# Altium PCB DB_1.PcbDoc
Units mm, origin at the board's own origin, x right, y up, seen from the top; angles counter-clockwise.
Board outline 57.15 x 76.2 mm, 4 copper layers (Top Layer, Signal Layer 1, Ground, Bottom Layer), stack 0.778 mm thick; 72 components, 63 nets, 359 pads, 131 vias.
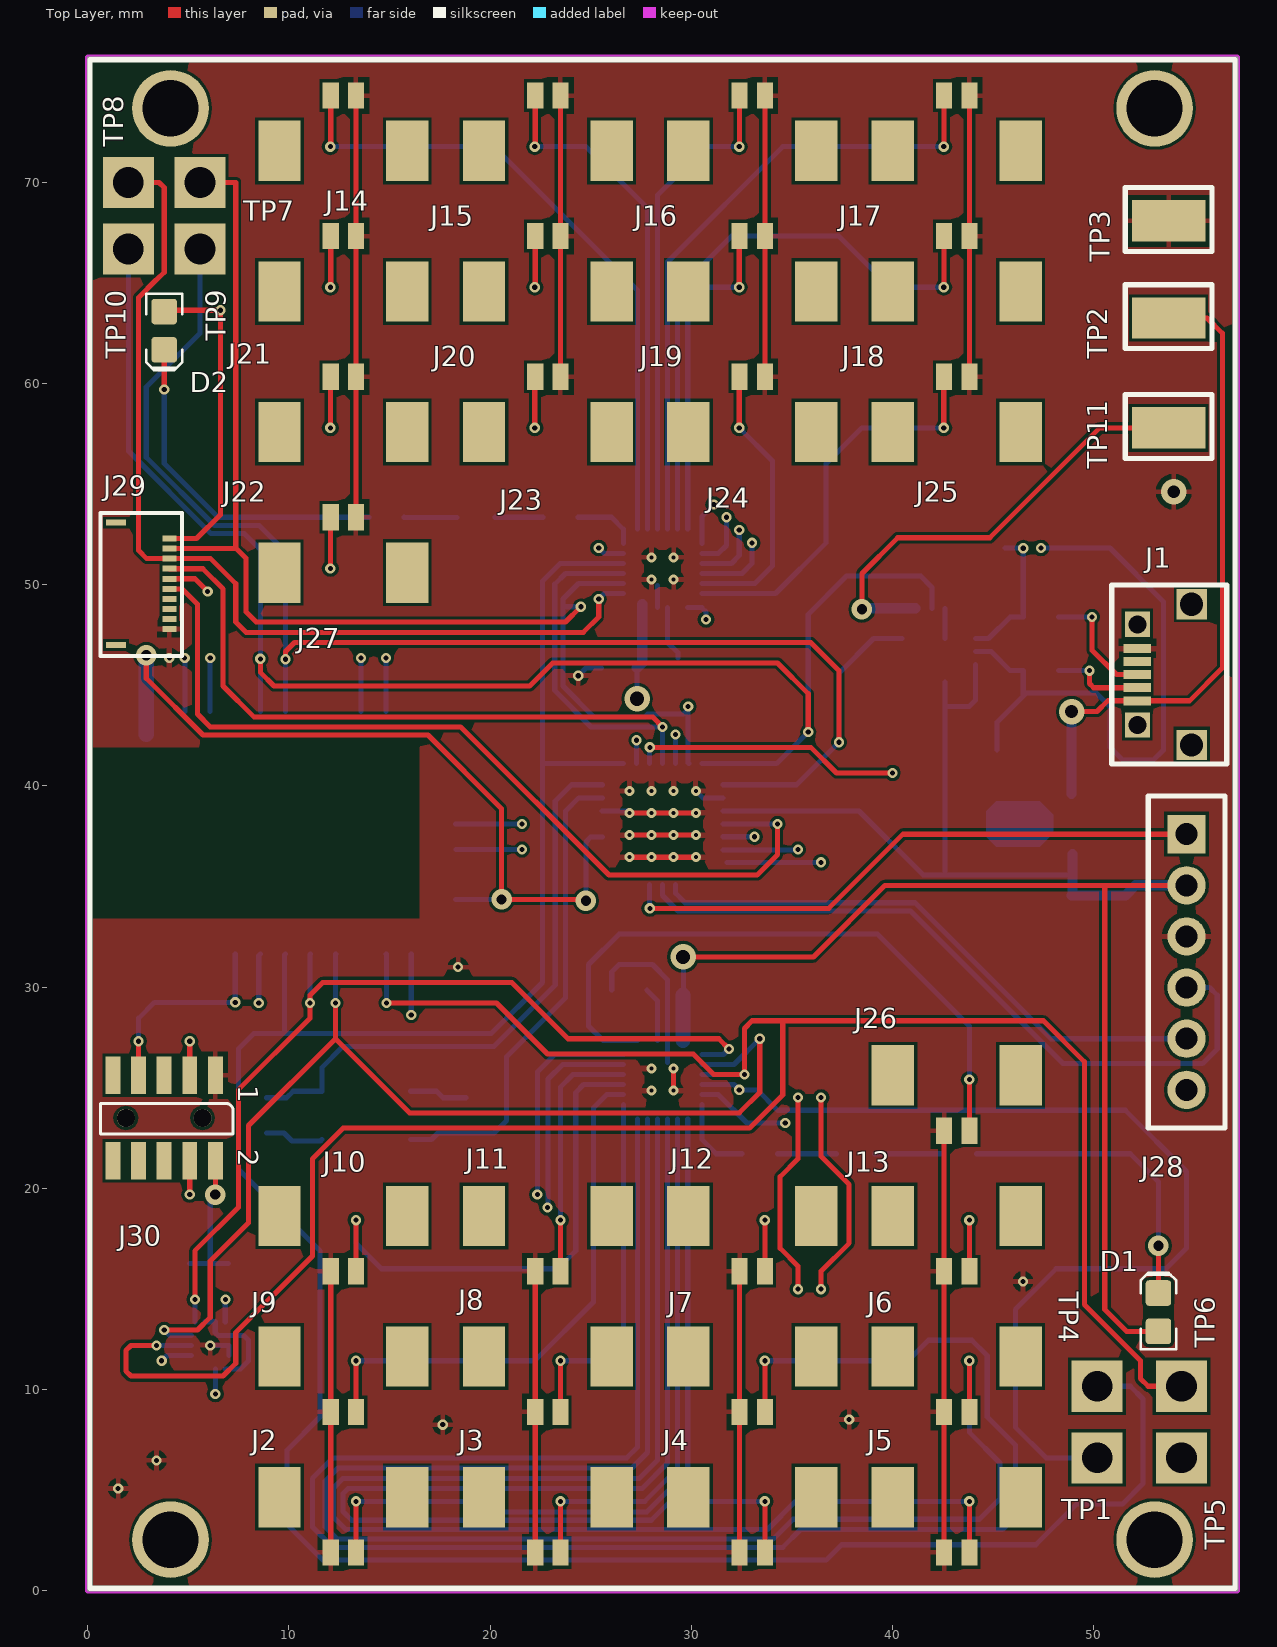
[diagram p0: Top Layer view]
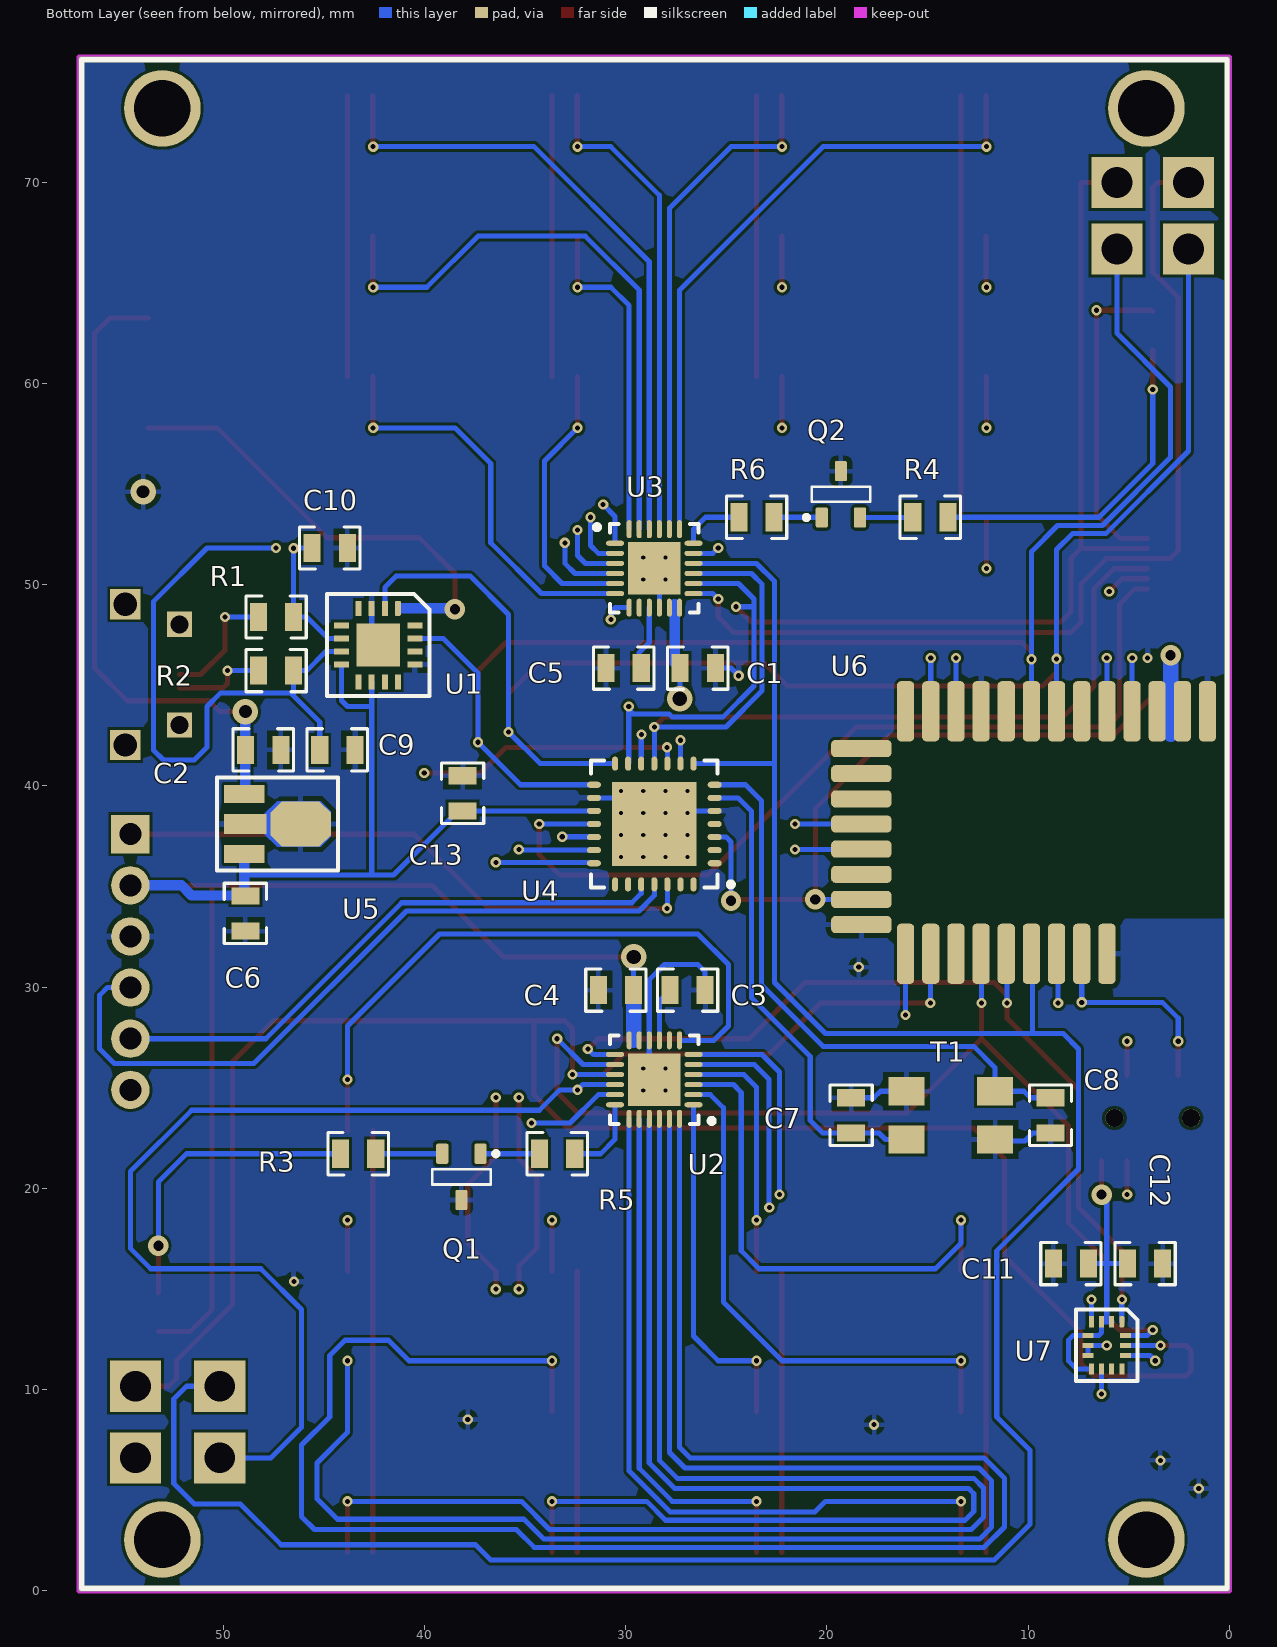
[diagram p1: Bottom Layer view, seen from below]
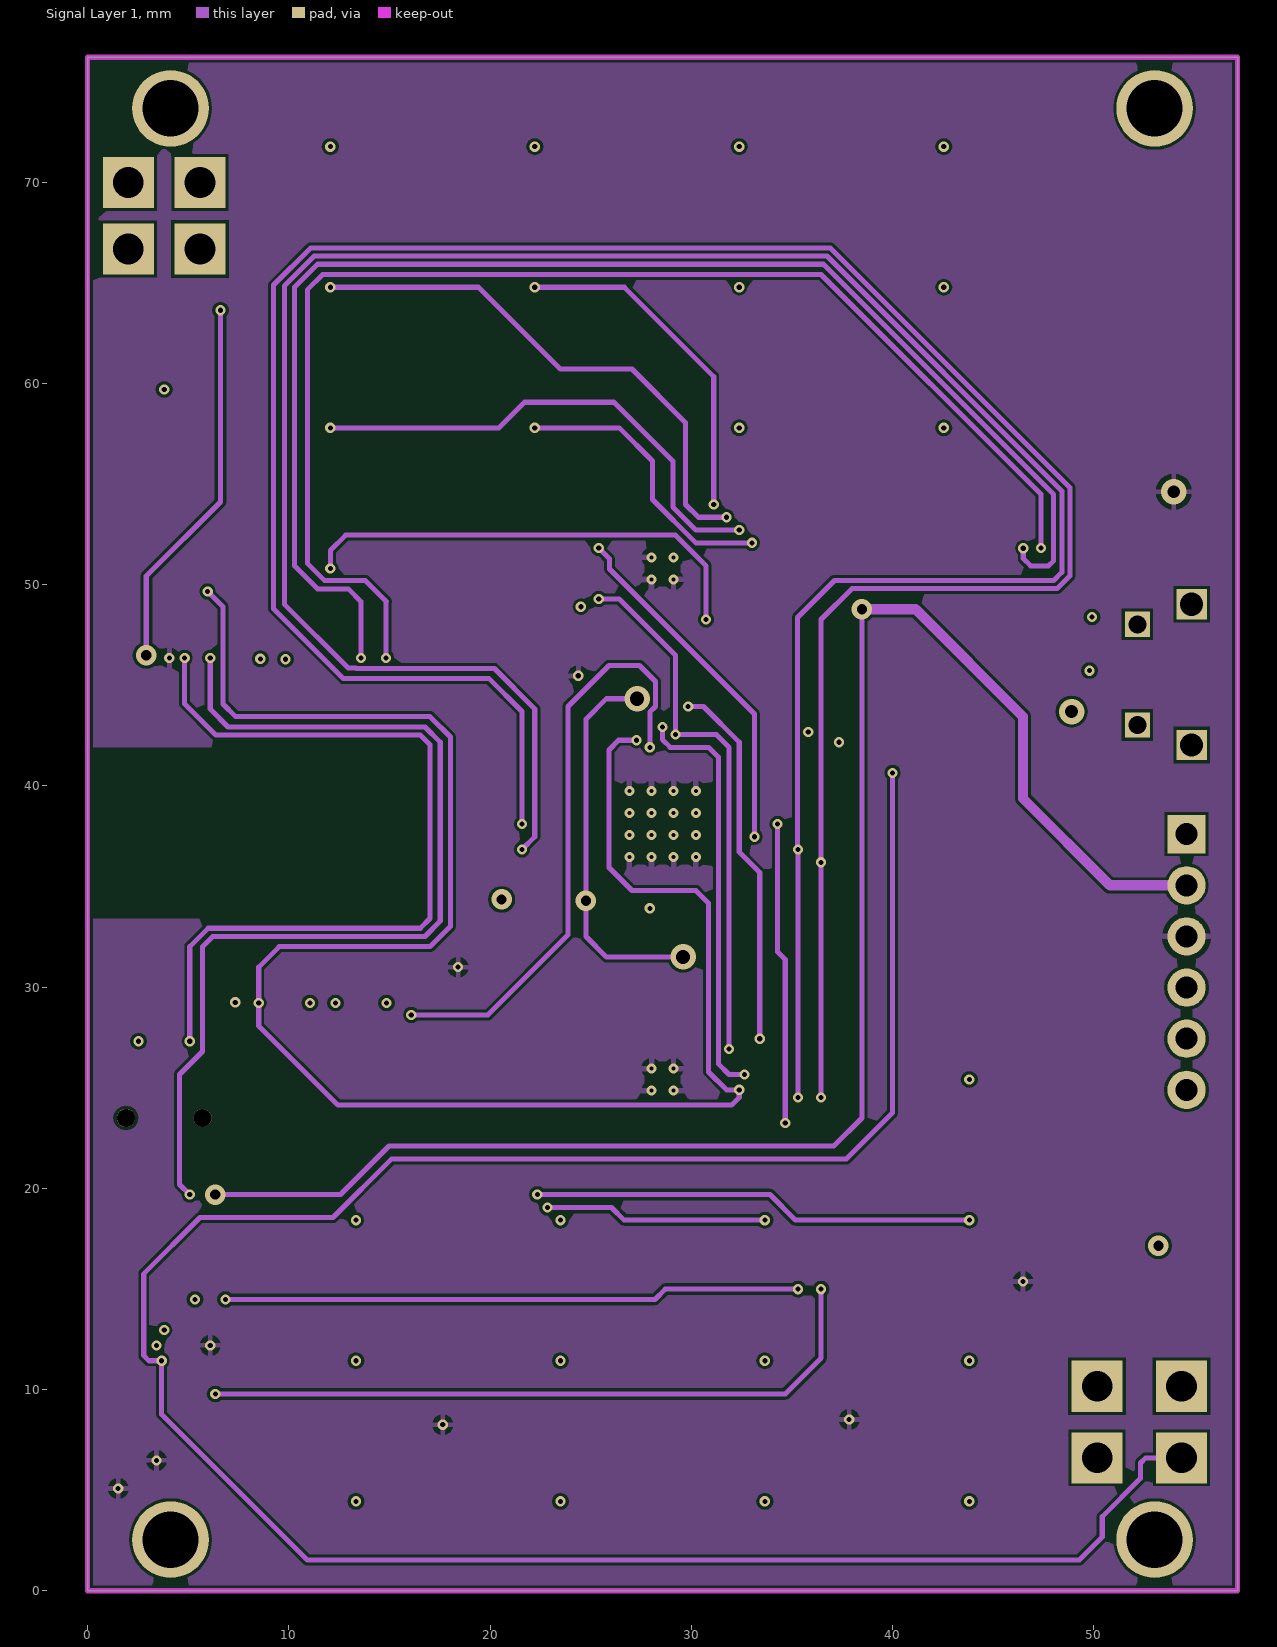
[diagram p2: Signal Layer 1]
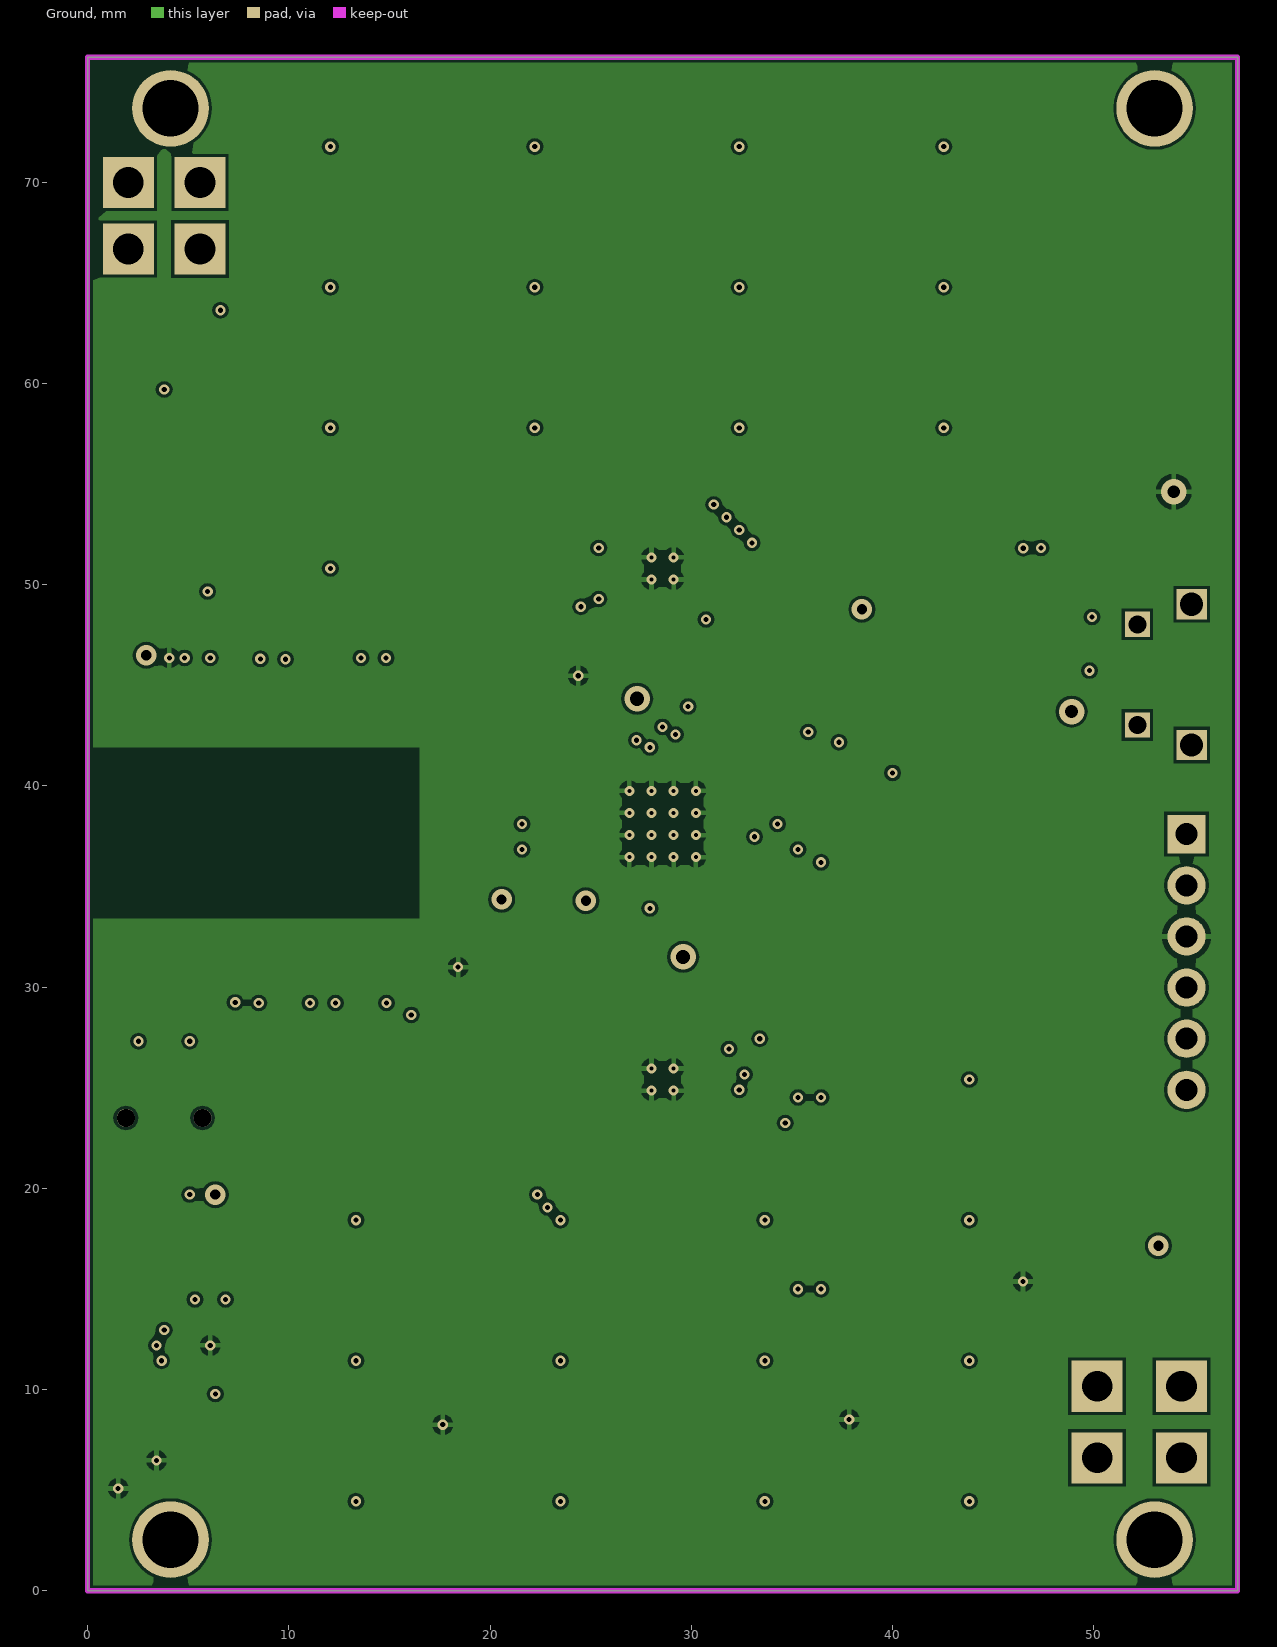
[diagram p3: Ground]
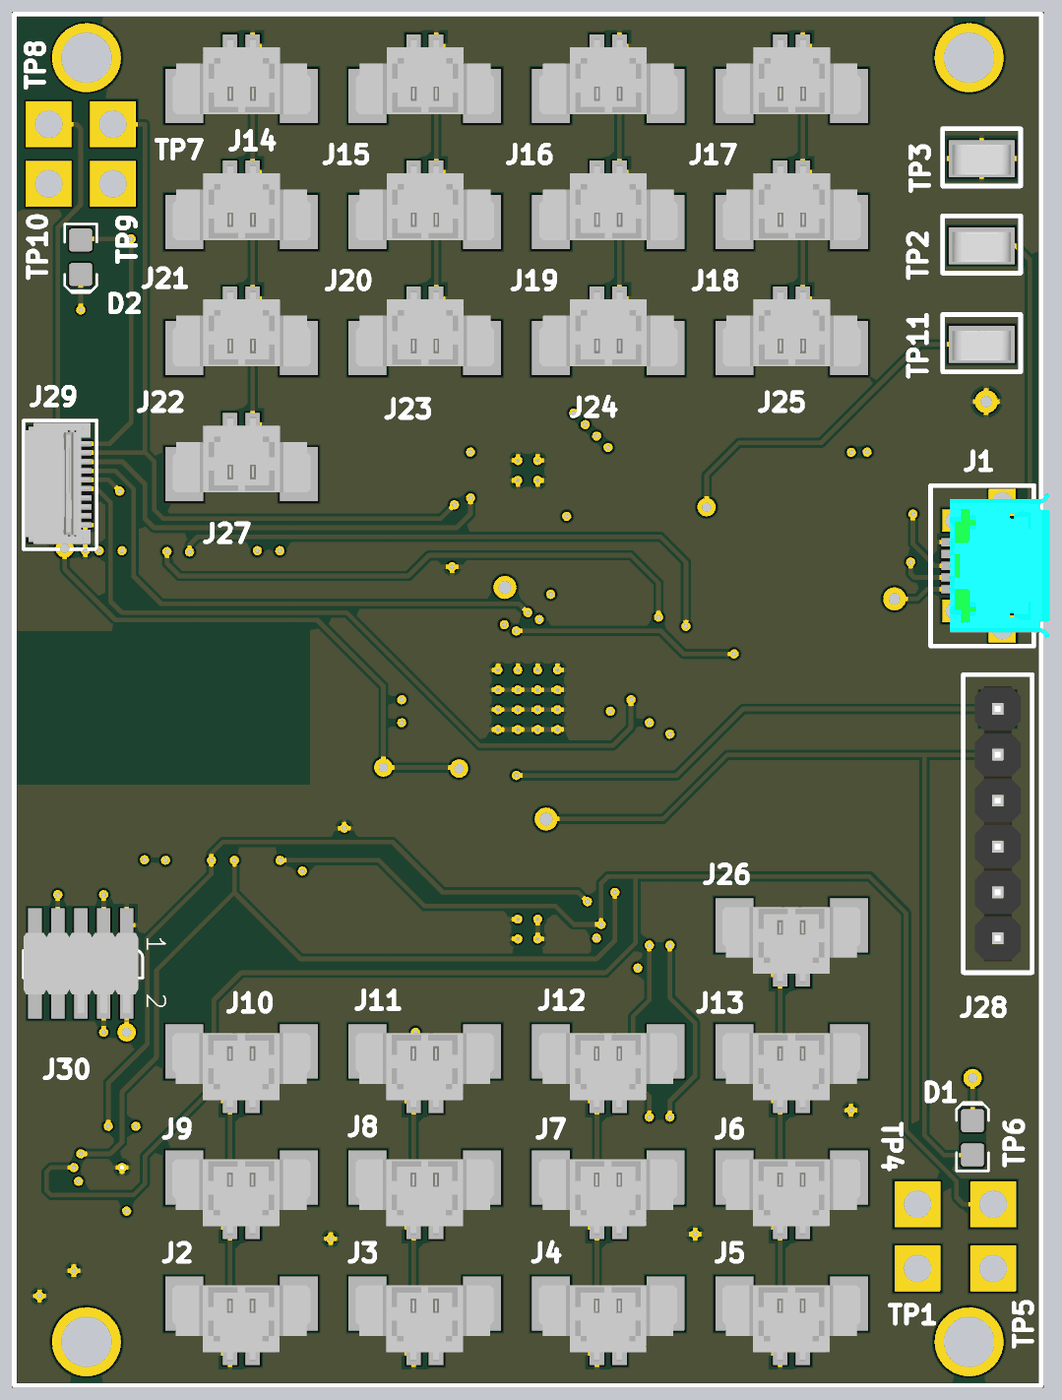
[diagram p4: 3D render of the assembled board from above, using the file's embedded part models]
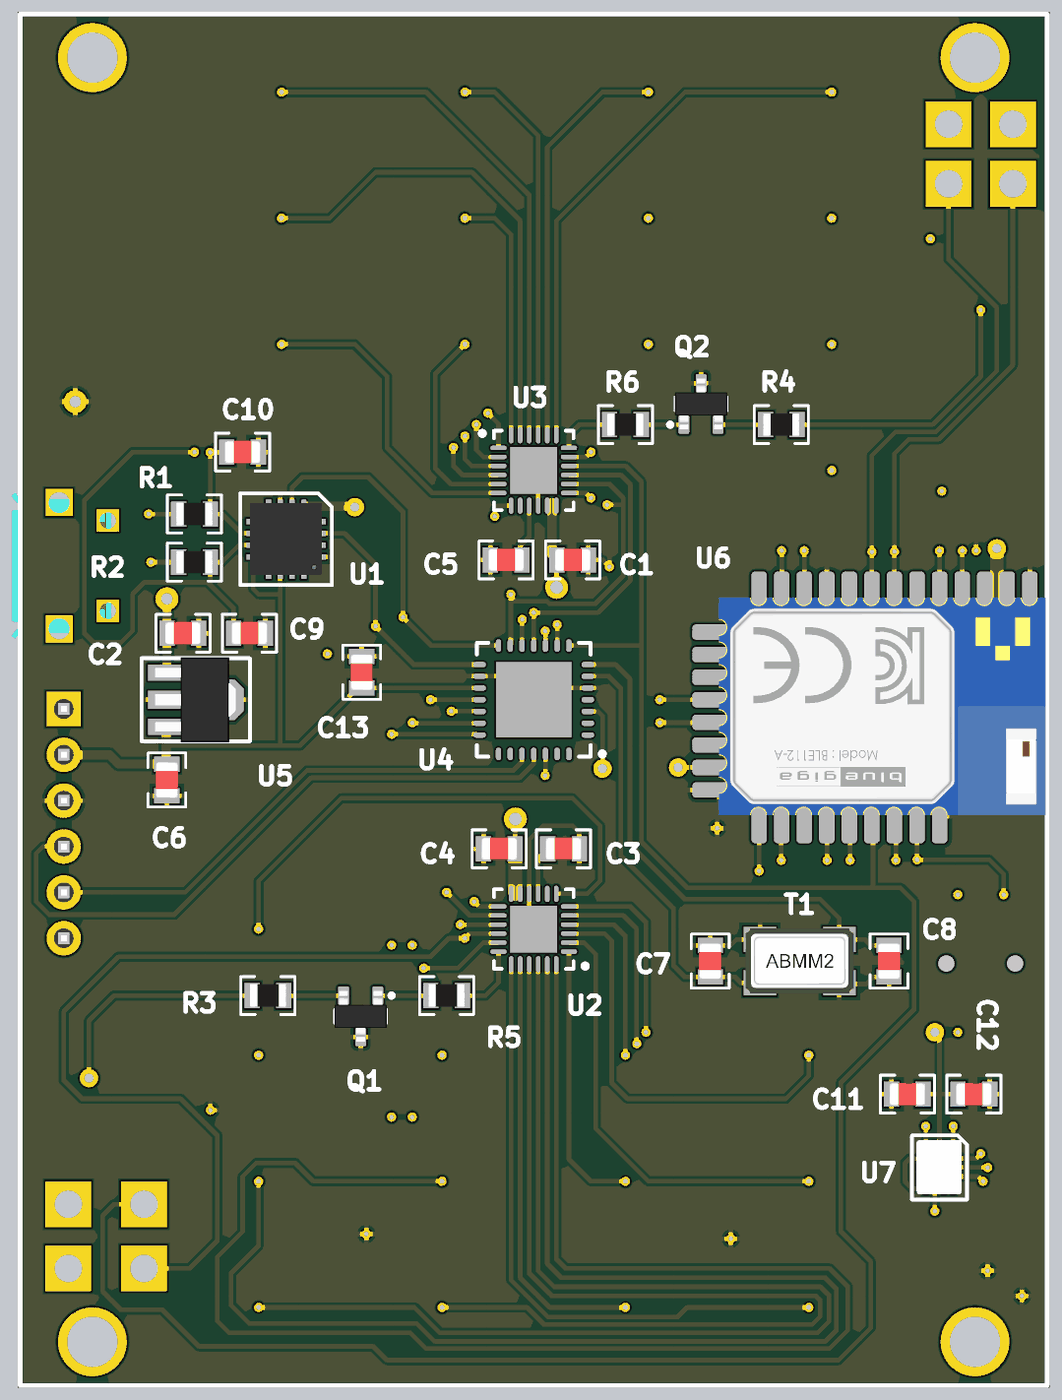
[diagram p5: 3D render of the assembled board from below, using the file's embedded part models]

## Layer stack, top to bottom
Top Solder: solder mask 0.0102, Solder Resist, Dk 3.5
Top Layer: signal copper 0.0356
Dielectric 1: core 0.254, FR-4, Dk 4.2
Signal Layer 1: signal copper 0.036
Dielectric 3: prepreg 0.127, Dk 4.2
Ground: signal copper 0.036
Dielectric 2: core 0.254, Dk 4.2
Bottom Layer: signal copper 0.0356
Bottom Solder: solder mask 0.0102, Solder Resist, Dk 3.5

## Board outline
0,0 57.15,0 57.15,76.2 0,76.2

## Design rules (kind name [scope] priority, off if disabled: settings)
Clearance [All] p1: gap=0.152
HoleSize [All] p1: absolutevalues=TRUE maxlimit=5.08 minlimit=0.025 maxpercent=80.000 minpercent=20.000
HoleToHoleClearance [All] p1: gap=0.152 allowstackedmicrovias=TRUE
MinimumSolderMaskSliver [All] p1: minsoldermaskwidth=0.152
PolygonConnect [All] p1: connectstyle=Relief reliefconductorwidth=0.254 reliefentries=4 polygonreliefangle="90 Angle" airgapwidth=0.254
RoutingVias [All] p1: holewidth=0.711 width=1.27 viastyle="Through Hole" minholewidth=0.203 minwidth=0.406 maxholewidth=0.711 maxwidth=1.27
SilkToSilkClearance [All] p1: silktosilkclearance=0.152
SilkToSolderMaskClearance [IsPad] p1: minsilkscreentomaskgap=0.152 clearancetoexposedcopper=TRUE
SolderMaskExpansion [All] p1: expansion=0.102
Width [All] p1: maxlimit=1.27 minlimit=0.152 preferedwidth=0.254
25 further rules are at their usual default settings.

## Components (designator, comment, footprint, x,y, rotation, side; value= is the part's Value field where it differs from the comment)
C1 "0.1µF" CAP-0805(2012)-R 26.416,45.847 r180 bottom
C2 "0.33µF" CAP-0805(2012)-R 48.006,41.783 r180 bottom
C3 "10000pF" CAP-0805(2012)-R 26.924,29.845 r180 bottom
C4 "0.1µF" CAP-0805(2012)-R 30.48,29.845 r0 bottom
C5 "10000pF" CAP-0805(2012)-R 30.099,45.847 r0 bottom
C6 "0.1µF" CAP-0805(2012)-R 48.895,33.655 r270 bottom
C7 "18pF" CAP-0805(2012)-R 18.796,23.622 r90 bottom
C8 "18pF" CAP-0805(2012)-R 8.89,23.622 r270 bottom
C9 "47pF" CAP-0805(2012)-R 44.323,41.783 r0 bottom
C10 "47pF" CAP-0805(2012)-R 44.704,51.816 r0 bottom
C11 "0.1µF" CAP-0805(2012)-R 7.874,16.256 r180 bottom
C12 "10000pF" CAP-0805(2012)-R 4.191,16.256 r0 bottom
C13 "0.1µF" CAP-0805(2012)-R 38.1,39.624 r90 bottom
D1 "YELLOW" LED-0805-A 53.213,13.843 r90 top
D2 "YELLOW" LED-0805-A 3.81,62.611 r270 top
J1 "USB" USB_CONNECTOR_5P_MICRO_USB_FCI 52.164,45.522 r90 top
J2 "Header 2 pin" WM7606CT-ND 13.335,1.905 r180 top
J3 "Header 2 pin" WM7606CT-ND 23.495,1.905 r180 top
J4 "Header 2 pin" WM7606CT-ND 33.655,1.905 r180 top
J5 "Header 2 pin" WM7606CT-ND 43.815,1.905 r180 top
J6 "Header 2 pin" WM7606CT-ND 43.815,8.89 r180 top
J7 "Header 2 pin" WM7606CT-ND 33.655,8.89 r180 top
J8 "Header 2 pin" WM7606CT-ND 23.495,8.89 r180 top
J9 "Header 2 pin" WM7606CT-ND 13.335,8.89 r180 top
J10 "Header 2 pin" WM7606CT-ND 13.335,15.875 r180 top
J11 "Header 2 pin" WM7606CT-ND 23.495,15.875 r180 top
J12 "Header 2 pin" WM7606CT-ND 33.655,15.875 r180 top
J13 "Header 2 pin" WM7606CT-ND 43.815,15.875 r180 top
J14 "Header 2 pin" WM7606CT-ND 12.085,74.295 r0 top
J15 "Header 2 pin" WM7606CT-ND 22.245,74.295 r0 top
J16 "Header 2 pin" WM7606CT-ND 32.405,74.295 r0 top
J17 "Header 2 pin" WM7606CT-ND 42.565,74.295 r0 top
J18 "Header 2 pin" WM7606CT-ND 42.565,67.31 r0 top
J19 "Header 2 pin" WM7606CT-ND 32.405,67.31 r0 top
J20 "Header 2 pin" WM7606CT-ND 22.245,67.31 r0 top
J21 "Header 2 pin" WM7606CT-ND 12.085,67.31 r0 top
J22 "Header 2 pin" WM7606CT-ND 12.085,60.325 r0 top
J23 "Header 2 pin" WM7606CT-ND 22.245,60.325 r0 top
J24 "Header 2 pin" WM7606CT-ND 32.405,60.325 r0 top
J25 "Header 2 pin" WM7606CT-ND 42.565,60.325 r0 top
J26 "Header 2 pin" WM7606CT-ND 43.815,22.86 r180 top
J27 "Header 2 pin" WM7606CT-ND 12.085,53.34 r0 top
J28 "Header 6 pin" HEADER-6-100MIL 54.61,37.592 r270 top
J29 "Header 10 pin" MOLEX-503480-1000 4.064,52.284 r270 top
J30 "GRPB052VWQP-RC" GRPB052VWQP-RC 1.27,25.616 r270 top
Q1 "Value" SOT23-3 38.161,20.567 r90 bottom
Q2 "Value" SOT23-3 19.304,54.483 r270 bottom
R1 "27" R-0805(2012)-R 47.371,48.387 r180 bottom
R2 "27" R-0805(2012)-R 47.371,45.72 r180 bottom
R3 "30" R-0805(2012)-R 43.293,21.717 r0 bottom
R4 "30" R-0805(2012)-R 14.859,53.34 r180 bottom
R5 "1k" R-0805(2012)-R 33.401,21.717 r180 bottom
R6 "1k" R-0805(2012)-R 23.495,53.34 r180 bottom
T1 "8MHz" CRYSTAL-8MHZ 13.843,23.622 r180 bottom
TP1 "Test Point" "TEST POINT" 50.165,6.604 r90 top
TP2 "S1751-46R" S1751-46R 53.721,63.246 r0 top
TP3 "S1751-46R" S1751-46R 53.721,68.072 r0 top
TP4 "Test Point" "TEST POINT" 50.165,10.16 r90 top
TP5 "Test Point" "TEST POINT" 54.356,6.604 r90 top
TP6 "Test Point" "TEST POINT" 54.356,10.16 r90 top
TP7 "Test Point" "TEST POINT" 5.588,69.977 r90 top
TP8 "Test Point" "TEST POINT" 2.032,69.977 r90 top
TP9 "Test Point" "TEST POINT" 5.588,66.675 r90 top
TP10 "Test Point" "TEST POINT" 2.032,66.675 r90 top
TP11 "S1751-46R" S1751-46R 53.721,57.785 r0 top
U1 "FT230XQ-R" QFN-16 42.291,46.99 r270 bottom
U2 "ADI-AD7147" LFCSP_WQ 28.575,25.4 r0 bottom
U3 "ADI-AD7147" LFCSP_WQ 28.575,50.8 r180 bottom
U4 "PIC18F25K80" MCHP-QFN-S-MM28_N 28.575,38.1 r0 bottom
U5 "L78L33ACUTR" SOT89-3 47.295,38.1 r180 bottom
U6 "BLE112-A-V1" BLE112-A-V1 18.288,43.7 r270 bottom
U7 "LSM6DS3H" LGA-14 6.096,12.192 r270 bottom

## Footprints (in the part's own frame and the unit in brackets; to place one, negate y for a bottom-side part, rotate by r counter-clockwise, add the part's x,y. Pads: shape width x height; smd on the part's side, far side on the other; paste and mask are expansions set on the pad)
BLE112-A-V1 [mm] "CLASS 2 BLTOOTH 4.0 MODULE"
  rrect50% 3x0.85 smd: 1(0,17.2) 2(0,15.95) 3(0,14.7) 4(0,13.45) 5(0,12.2) 6(0,10.95) 7(0,9.7) 8(0,8.45) 9(0,7.2) 10(0,5.95) 11(0,4.7) 12(0,3.45) 13(0,2.2) 22(12.05,2.2) 23(12.05,3.45) 24(12.05,4.7) 25(12.05,5.95) 26(12.05,7.2) 27(12.05,8.45) 28(12.05,9.7) 29(12.05,10.95) 30(12.05,12.2)
  rrect50% 0.85x3 smd: 14(1.85,0) 15(3.1,0) 16(4.35,0) 17(5.6,0) 18(6.85,0) 19(8.1,0) 20(9.35,0) 21(10.6,0)
  body extent -0.06,-0.03 11.99,18.07, height 2.3
CAP-0805(2012)-R [mm] "Capacitor 0805(2012) Reflow"
  rect 0.85x1.4 smd: 1(-0.875,0) 2(0.875,0)
  silkscreen extent -1.5,-1.05 1.5,1.05, body extent -1,-0.63 1,0.63, height 0.78
CRYSTAL-8MHZ [mm] "ABRACON ABMM2-8.000MHZ-E2-T"
  rect 1.8x1.4 smd: 1(-2.2,-1.2) 2(-2.2,1.2) 2(2.2,-1.2) 3(2.2,1.2)
  body extent -3,-1.78 3,1.82, height 1.21
GRPB052VWQP-RC [mm] "CONN HEADER .050\" 10PS DL SMD AU"
  rect 1.85x0.74 smd: 1(0,5.08) 2(4.25,5.08) 3(0,3.81) 4(4.25,3.81) 5(0,2.54) 6(4.25,2.54) 7(0,1.27) 8(4.25,1.27) 9(0,0) 10(4.25,0)
  round 0.9 hole 0.9 unplated: 21(2.121,0.635) 22(2.121,4.445)
  silkscreen extent 1.4,-0.63 2.92,5.97, body extent -0.62,-0.63 4.88,5.72, height 4.1
HEADER-6-100MIL [mil] "100 mil spacing"
  rect 75x75 hole 43: 1(0,0)
  round 75 hole 43: 2(100,0) 3(200,0) 4(300,0) 5(400,0) 6(500,0)
  silkscreen extent -75,-75 575,75, body extent -50,-50 550,50, height 339
LED-0805-A [mil]
  round 20 on Mech14: 0(0,0)
  rrect25% 50x50 smd: A(-37.5,0) K(37.5,0)
  Top Layer pour cut-out: -15,30 15,30 15,-30 -15,-30
  silkscreen extent -72,-35 77,35, body extent -39,-25 39,25, height 31
LFCSP_WQ [mm] "QFN, 24-Leads, Body 4x4mm, Pitch 0.5mm, Thermal Pad 2.5x2.5mm, IPC Medium Density"
  oval 0.9x0.25 smd: 1(-1.95,1.25) 2(-1.95,0.75) 3(-1.95,0.25) 4(-1.95,-0.25) 5(-1.95,-0.75) 6(-1.95,-1.25) 13(1.95,-1.25) 14(1.95,-0.75) 15(1.95,-0.25) 16(1.95,0.25) 17(1.95,0.75) 18(1.95,1.25)
  oval 0.25x0.9 smd: 7(-1.25,-1.95) 8(-0.75,-1.95) 9(-0.25,-1.95) 10(0.25,-1.95) 11(0.75,-1.95) 12(1.25,-1.95) 19(1.25,1.95) 20(0.75,1.95) 21(0.25,1.95) 22(-0.25,1.95) 23(-0.75,1.95) 24(-1.25,1.95)
  rect 2.6x2.6 smd: 25(0,0)
  silkscreen extent -2.97,-2.2 2.2,2.2, body extent -2.05,-2.05 2.05,2.05, height 1
LGA-14 [mm] "LGA-14 2.5X3X0.86 14L"
  rrect50% 0.55x0.25 smd: 1(-1.175,0.75)
  rect 0.55x0.25 smd: 2(-1.175,0.25) 3(-1.175,-0.25) 4(-1.175,-0.75) 8(1.175,-0.75) 9(1.175,-0.25) 10(1.175,0.25) 11(1.175,0.75)
  rect 0.25x0.55 smd: 5(-0.5,-0.925) 6(0,-0.925) 7(0.5,-0.925) 12(0.5,0.925) 13(0,0.925) 14(-0.5,0.925)
  silkscreen extent -1.78,-1.52 1.78,1.52, body extent -1.52,-1.27 1.48,1.23, height 0.86
MCHP-QFN-S-MM28_N [mm] "QFN, 28-Leads, Body 6x6mm, Pitch 0.65mm, Thermal Pad 4.175x4.175mm, IPC Medium Density"
  oval 0.7x0.3 smd: 1(-3,1.95) 2(-3,1.3) 3(-3,0.65) 4(-3,0) 5(-3,-0.65) 6(-3,-1.3) 7(-3,-1.95) 15(3,-1.95) 16(3,-1.3) 17(3,-0.65) 18(3,0) 19(3,0.65) 20(3,1.3) 21(3,1.95)
  oval 0.3x0.7 smd: 8(-1.95,-3) 9(-1.3,-3) 10(-0.65,-3) 11(0,-3) 12(0.65,-3) 13(1.3,-3) 14(1.95,-3) 22(1.95,3) 23(1.3,3) 24(0.65,3) 25(0,3) 26(-0.65,3) 27(-1.3,3) 28(-1.95,3)
  rect 4.18x4.18 smd: 29(0,0)
  silkscreen extent -3.92,-3.15 3.15,3.15, body extent -3,-3 3,3, height 1
MOLEX-503480-1000 [mm] "FPC Connector, 10-Leads, Right Angle, Pitch 0.5 mm, Mated Height 1.0 mm, SMT"
  rect 0.3x0.7 smd: 1(0,0) 2(0.5,0) 3(1,0) 4(1.5,0) 5(2,0) 6(2.5,0) 7(3,0) 8(3.5,0) 9(4,0) 10(4.5,0)
  rect 0.3x1 smd: MP1(-0.79,-2.65) MP2(5.29,-2.65)
  silkscreen extent -1.27,-3.43 5.84,0.64, body extent -1.14,-3.32 5.56,0.28, height 1.88
QFN-16 [mm]
  rrect50% 0.75x0.3 smd: 1(-1.825,0.975)
  rect 0.75x0.3 smd: 2(-1.825,0.325) 3(-1.825,-0.325) 4(-1.825,-0.975) 9(1.825,-0.975) 10(1.825,-0.325) 11(1.825,0.325) 12(1.825,0.975)
  rect 0.3x0.75 smd: 5(-0.975,-1.825) 6(-0.325,-1.825) 7(0.325,-1.825) 8(0.975,-1.825) 13(0.975,1.825) 14(0.325,1.825) 15(-0.325,1.825) 16(-0.975,1.825)
  rect 2.15x2.15 smd: 17(0,0)
  silkscreen extent -2.54,-2.54 2.54,2.54, body extent -2,-2 2,2, height 0.92
R-0805(2012)-R [mm] "Resistor 0805(2012) Reflow"
  rect 0.85x1.4 smd: 1(-0.875,0) 2(0.875,0)
  silkscreen extent -1.5,-1.05 1.5,1.05, body extent -1,-0.62 1,0.63, height 0.5
S1751-46R [mm] "PC TEST POINT TIN SMD"
  rect 3.65x2.05 smd: 1(0,0)
  silkscreen extent -2.16,-1.52 2.16,1.65, body extent -1.62,-0.89 1.62,0.76, height 2.05
SOT23-3 [mm] "SOT23, 3 pin"
  round 0.5 on Mech14: 0(0,0)
  rrect25% 1x0.6 smd: 1(1.15,-0.95) 2(-1.15,0) 3(1.15,0.95)
  silkscreen extent -0.38,-1.81 1.25,1.45, body extent -1.4,-1.45 1.4,1.45, height 1.29
SOT89-3 [mm] "JEDEC TO-243 option AA / SOT89"
  round 1 on Mech14: 0(0,0)
  rrect1% 2x0.9 smd: 1(-1.65,1.5) 3(-1.65,-1.5)
  rrect1% 2.1x1 smd: 2(-1.6,0)
  oct 3x2.25 smd: 2(1.15,0)
  Top Layer region: -0.7,-0.45 -0.025,-1.125 2.15,-1.125 2.65,-0.625 2.65,0.625 2.15,1.125 -0.025,1.125 -0.7,0.45
  silkscreen extent -3,-2.3 3,2.3, body extent -2.25,-2.35 2.2,2.35, height 1.69
"TEST POINT" [mil]
  rect 100x100 hole 60: 1(0,0)
USB_CONNECTOR_5P_MICRO_USB_FCI [mm] "USB_Connector_5P_MICRO_USB_FCI_TypeB"
  rect 0.45x1.35 smd: 1(-1.3,0) 2(-0.65,0) 3(0,0) 4(0.65,0) 5(1.3,0)
  rect 1.25x1.25 hole 0.9: 15(2.5,0) 16(-2.5,0)
  rect 1.5x1.5 hole 1.15: 18(-3.5,-2.7) 18(3.5,-2.7)
  silkscreen extent -4.44,-4.44 4.44,1.27, body extent -4.03,-5.33 4.02,0.25, height 2.73
WM7606CT-ND [mm]
  rect 2.1x3 smd: 0(-2.55,-2.75) 0(3.8,-2.75)
  rect 0.8x1.3 smd: 1(0,0) 2(1.25,0)
  body extent -3.19,-3.76 4.46,0.44, height 4.72

## Part data
C1 C2 C3 C4 C5 C6 C7 C8 C9 C10 C11 C12 C13: library part C-0805(2012), "___ OHM ___ mW 0805(2012) SMD"
D1 D2: library part LED_0805_YELLOW, "LED, 0805 SMD, YELLOW"
J1: "USB_Connector_5P_MICRO_USB_FCI"
J2 J3 J4 J5 J6 J7 J8 J9 J10 J11 J12 J13 J14 J15 J16 J17 J18 J19 J20 J21 J22 J23 J24 J25 J26 J27: library part CON-2Pin, "Header, 2 pin, .1 pitch"
J28: library part CON-6Pin-100Mil, "Header, 6 pin, .1 pitch"
J29: library part WM1389CT-ND, "Header, 10 pin, .50mm pitch"
J30: "CONN HEADER .050\" 10PS DL SMD AU"
Q1 Q2: library part FMMT591CT-ND, "Transistor PNP"
R1 R2 R3 R4 R5 R6: library part R-0805(2012), "___ OHM ___ mW 0805(2012) SMD"
T1: library part CRYSTAL_8MHz, "Oscillator Crystal 8MHz 10ppm"
TP1 TP4 TP5 TP6 TP7 TP8 TP9 TP10: "Test Point Hole"
TP2 TP3 TP11: "PC TEST POINT TIN SMD"
U1: "USB to Basic UART Interface Chip, UHCI/OHCI/EHCI Compatible, USB 2.0 Compatible, -40 to +85 degC, 16-Pin QFN, Pb-Free, Tape and Reel"
U6: "CLASS 2 BLTOOTH 4.0 MODULE"
U7: "3D accelerometer and 3D gyroscope"

## Free pads (board coordinates)
  round 3.81 hole 2.794: 0(4.127,2.54) 0(4.127,73.66) 0(53.023,2.54) 0(53.023,73.66)

## Via types
v1: diameter 0.508, hole 0.254, Top Layer to Bottom Layer, 97 vias
v2: diameter 0.5, hole 0.2, Top Layer to Bottom Layer, 24 vias
v3: diameter 1.016, hole 0.508, Top Layer to Bottom Layer, 6 vias
v4: diameter 1.27, hole 0.635, Top Layer to Bottom Layer, 2 vias
v5: diameter 1.27, hole 0.711, Top Layer to Bottom Layer, 2 vias

## Nets (pads, with @x,y where several pads share a name; then routed paths per layer and width w, separated by ;. In a path a pad name is that pad's centre, name@x,y a point inside that pad or via, vN(x,y) a via of type N, cw(c..) or ccw(c..) an arc to the next point about the centre after c; other vN are vias at no path point)
3.3V: C1.1 C4.1 C6.1 C11.2 C12.2 C13.1 D1.A D2.A J28.2 J29.1 J30.2 TP11.1 U1.1 U1.8 U1.10 U2.11 U2.12 U3.11 U3.12 U4.3 U4.17 U5.3 U6.2 U6.3 U6.20 U7.2 U7.3 U7.5 U7.8 | length 314
  Top Layer w0.254: v3(2.921,46.482) 2.921,45.339 5.74,42.52 16.916,42.52 20.574,38.862 v3(20.574,34.35) 24.705,34.35 v3(24.765,34.29) ; D2.A 3.873,63.627 v1(6.604,63.627) 6.604,53.467 5.421,52.284 J29.1 ; v3(6.35,19.685) J30.2 ; v5(29.591,31.496) 36.068,31.496 39.624,35.052 50.546,35.052 ; v3(38.481,48.768) 38.481,50.546 40.259,52.324 44.831,52.324 50.292,57.785 TP11.1 ; D1.A 51.625,12.89 50.546,13.97 50.546,35.052 ; J28.2 50.546,35.052
  Signal Layer 1 w0.254: v3(2.921,46.482) 2.921,50.419 6.604,54.102 v1(6.604,63.627) ; v3(6.35,19.685) 12.573,19.685 14.986,22.098 37.084,22.098 38.481,23.495 v3(38.481,48.768) ; v5(27.305,44.323) 25.781,44.323 24.765,43.307 v3(24.765,34.29) 24.765,32.512 25.781,31.496 v5(29.591,31.496)
  Signal Layer 1 w0.508: v3(38.481,48.768) 41.148,48.768 46.482,43.434 46.482,39.37 50.8,35.052 J28.2
  Bottom Layer w0.254: C12.2 6.096,16.256 ; U7.2 6.096,13.367 ; v3(6.35,19.685) 6.096,19.431 6.096,16.256 ; U7.8 7.588,11.017 8.001,11.43 8.001,12.446 7.755,12.692 U7.5 6.485,12.692 6.346,12.831 U7.3 6.096,13.367 ; C11.2 6.096,16.256 ; U6.20 v3(20.574,34.35) ; v3(24.765,34.29) 24.765,37.211 25.004,37.45 U4.3 ; v5(27.305,44.323) C1.1@27.305,45.833 ; v5(29.591,31.496) 29.605,31.482 C4.1 ; U4.17 38.339,38.75 41.529,35.56 48.945,35.56 ; 42.616,35.631 U1.10 ; 42.616,43.942 43.815,43.942 44.116,44.243 U1.8 ; 6.096,13.367 6.096,16.256
  Bottom Layer w0.508: C1.1 27.559,46.115 27.559,49.022 ; v3(38.481,48.768) 38.528,48.815 41.148,48.815 ; C6.1@48.895,34.544 51.562,34.544 52.07,35.052 J28.2 ; C6.1@48.945,34.594 48.945,35.56 U5.3
  Bottom Layer w0.762: 2.921,42.545 v3(2.921,46.482) ; 29.591,27.35 C4.1@29.591,29.591
A_INT1: U4.20 U6.18 U7.4 | length 170.7
  Top Layer w0.254: v1(35.306,14.986) 35.306,16.129 34.417,17.018 34.417,20.574 35.306,21.463 v1(35.306,24.511)
  Signal Layer 1 w0.254: v1(6.858,14.478) 28.194,14.478 28.702,14.986 v1(35.306,14.986) ; v1(21.59,36.83) 22.225,37.465 22.225,43.815 20.218,45.822 13.368,45.822 13.343,45.847 12.954,45.847 9.779,49.022 9.779,64.837 11.262,66.319 36.738,66.319 48.412,54.645 48.412,50.606 48.006,50.2 37.119,50.2 35.281,48.362 v1@35.281,36.855 ; v1(35.306,24.511) v1(35.306,36.83)
  Bottom Layer w0.254: U7.4 v1@6.846,14.466 ; U6.18@18.308,36.83 v1(21.59,36.83) ; U4.20 v1@35.276,36.8
A_INT2: U4.21 U6.17 U7.9 | length 176.9
  Top Layer w0.254: v1(36.449,14.986) 36.449,15.875 37.846,17.272 37.846,20.193 36.449,21.59 v1(36.449,24.511)
  Signal Layer 1 w0.254: v1(6.35,9.779) 34.671,9.779 36.449,11.557 v1(36.449,14.986) ; v1(21.59,38.1) 21.59,43.688 19.939,45.339 12.7,45.339 9.246,48.793 9.246,64.878 11.093,66.726 36.906,66.726 48.819,54.813 48.819,50.438 48.174,49.793 37.982,49.793 36.449,48.26 v1(36.449,36.195) v1(36.449,24.511)
  Bottom Layer w0.254: v1(6.35,9.779) U7.9@6.35,11.013 ; U6.17 v1(21.59,38.1) ; U4.21@31.784,36.195 v1(36.449,36.195)
CLK_IN: C7.1 T1.1 U4.6 | length 23.9
  Bottom Layer w0.254: T1.1 17.088,22.422 17.413,22.747 C7.1 20.207,22.747 20.828,23.368 20.828,26.543 23.749,29.464 23.749,38.735 24.414,39.4 U4.6
CLK_OUT: C8.1 T1.3 U4.7 | length 29.2
  Bottom Layer w0.254: C8.1 9.892,24.497 10.217,24.822 T1.3 11.643,25.994 12.7,27.051 20.193,27.051 23.241,30.099 23.241,39.243 24.048,40.05 U4.7
CS1: J29.5 TP1.1 U2.16 U4.9 U6.28 | length 145.8
  Top Layer w0.254: J29.5 5.342,50.284 v1(5.969,49.657)
  Signal Layer 1 w0.254: v1(5.969,49.657) 6.731,48.895 6.731,44.069 7.366,43.434 17.018,43.434 18.034,42.418 18.034,33.02 17.018,32.004 9.525,32.004 8.509,30.988 v1(8.509,29.21) 8.509,28.067 12.446,24.13 32.004,24.13 32.385,24.511 v1(32.385,24.892) 31.75,24.892 30.861,25.781 30.861,34.163 30.226,34.798 27.051,34.798 25.908,35.941 25.908,41.783 26.386,42.261 v1(27.275,42.261)
  Bottom Layer w0.254: v1(8.509,29.21) 8.509,31.571 U6.28 ; U4.9 v1(27.275,42.261) ; U2.16 32.127,25.15 v1(32.385,24.892) 33.274,24.892 34.29,23.876 51.562,23.876 54.61,20.828 54.61,17.018 53.594,16.002 48.133,16.002 46.101,13.97 46.101,8.128 47.625,6.604 TP1.1
CS2: TP4.1 U3.16 U4.8 U6.27 | length 126.4
  Bottom Layer w0.254: U6.27 9.779,31.591 9.779,27.686 ; U4.8 22.606,41.1 ; U3.16 23.491,51.05 22.606,50.165 22.606,41.1 ; TP4.1 51.816,10.16 52.451,9.525 52.451,5.334 51.435,4.318 49.149,4.318 47.117,2.286 37.465,2.286 36.703,1.524 11.684,1.524 9.906,3.302 9.906,6.985 11.557,8.636 11.557,16.891 7.493,20.955 7.493,26.924 8.255,27.686 9.779,27.686 ; 9.779,27.686 20.066,27.686 22.606,30.226 22.606,41.1
CS3: TP5.1 U4.10 U6.22 U7.12 | length 169.7
  Top Layer w0.254: v1(27.94,41.91) 35.941,41.91 37.211,40.64 v1(40.005,40.64)
  Signal Layer 1 w0.254: v1(16.088,28.616) 19.898,28.616 23.876,32.594 23.876,43.942 25.908,45.974 27.432,45.974 28.219,45.187 28.219,43.944 27.94,43.665 v1(27.94,41.91) ; v1(40.005,40.64) 40.005,23.749 37.719,21.463 15.113,21.463 12.192,18.542 5.588,18.542 2.794,15.748 2.794,11.684 3.048,11.43 v1(3.683,11.43) 3.683,8.763 10.922,1.524 49.276,1.524 50.419,2.667 50.419,3.683 52.324,5.588 52.324,6.35 52.578,6.604 TP5.1
  Bottom Layer w0.254: v1(3.683,11.43) 3.945,11.692 U7.12 ; v1(16.088,28.616) U6.22 ; U4.10 27.925,41.895 v1(27.94,41.91)
GND: C1.2 C2.2 C3.2 C4.2 C5.2 C6.2 C7.2 C8.2 C9.1 C10.1 C11.1 C12.1 C13.2 J1.5 J2.2 J3.2 J4.2 J5.2 J6.2 J7.2 J8.2 J9.2 J10.2 J11.2 J12.2 J13.2 J14.2 J15.2 J16.2 J17.2 J18.2 J19.2 J20.2 J21.2 J22.2 J23.2 J24.2 J25.2 J26.2 J27.2 J28.3 J29.10 J30.1 Q1.2 Q2.2 T1.2 TP3.1 U1.3 U1.13 U1.17 U2.10 U2.25 U3.10 U3.25 U4.5 U4.16 U4.29 U5.2 U6.1 U6.10 U6.21 U6.30 U7.6 U7.7 | length 159.3
  Top Layer w0.254: J2.2 J9.2 J10.2@12.085,16.129 ; J27.2 J22.2 J21.2 J14.2 ; J3.2 J8.2 J11.2 ; J23.2 J20.2 J15.2 ; v2(26.925,36.45) v2(28.025,36.45) v2(29.125,36.45) v2(30.225,36.45) ; v2(26.925,37.55) v2(28.025,37.55) v2(29.125,37.55) v2(30.225,37.55) ; v2(26.925,38.65) v2(28.025,38.65) v2(29.125,38.65) v2(30.225,38.65) ; v2(29.125,24.85) v2(29.125,25.95) ; J4.2 J7.2 J12.2 ; J24.2 J19.2 J16.2 ; J5.2 J6.2 J13.2 J26.2 ; J25.2 J18.2 J17.2
  Bottom Layer w0.254: v1(6.096,12.192) U7.6 U7.7 ; C8.2 9.765,22.747 10.16,22.352 11.573,22.352 T1.2@11.643,22.422 ; T1.2@16.043,24.822 17.342,24.822 17.667,24.497 C7.2 ; v1(24.384,45.466) 24.765,45.847 C1.2 ; U4.5 26.825,38.75 v2(26.925,38.65) ; C3.2 26.049,30.748 26.416,31.115 28.067,31.115 28.825,30.357 U2.10 U2.25@28.825,26.25 ; U3.10 U3.25@28.325,49.95 ; v2(30.225,39.75) 30.575,39.4 U4.16 ; U1.17@42.616,47.315 U1.3
  other v1: 1.524,5.08 3.429,6.477 17.653,8.255 37.846,8.509 46.482,15.367 18.415,30.988 4.064,46.355
  other v2: 28.025,24.85 28.025,25.95 26.925,39.75 28.025,39.75 29.125,39.75 28.025,50.25 29.125,50.25 28.025,51.35 29.125,51.35
  other v4: 53.975,54.61
ICSPCLK: J28.5 U4.24 | length 28.8
  Bottom Layer w0.254: U4.24 29.225,34.656 29.693,34.188 41.123,34.188 47.879,27.432 J28.5
ICSPDAT: J28.4 U4.25 | length 36.2
  Bottom Layer w0.254: U4.25 28.575,34.544 29.337,33.782 40.894,33.782 48.476,26.2 55.41,26.2 56.134,26.924 56.134,29.591 55.753,29.972 J28.4
INT_1: J29.6 U2.17 U4.18 | length 63.7
  Top Layer w0.254: J29.6 4.699,49.784 5.461,49.022 5.461,43.561 6.096,42.926 18.542,42.926 25.908,35.56 33.274,35.56 34.29,36.576 v1(34.29,38.1)
  Signal Layer 1 w0.254: v1(34.29,38.1) 34.29,31.75 34.671,31.369 v1(34.671,23.241)
  Bottom Layer w0.254: U2.17 31.357,24.65 32.766,23.241 v1(34.671,23.241) ; U4.18 v1(34.29,38.1)
INT_2: U3.17 U4.19 | length 20.5
  Signal Layer 1 w0.254: v1(25.4,51.816) 25.933,51.283 25.933,50.775 33.147,43.561 v1(33.147,37.465)
  Bottom Layer w0.254: v1(25.4,51.816) 25.666,51.55 U3.17 ; U4.19 31.59,37.465 v1(33.147,37.465)
MCLR: J28.1 U4.26 | length 29.4
  Top Layer w0.254: v1(27.94,33.909) 36.83,33.909 40.513,37.592 J28.1
  Bottom Layer w0.254: U4.26 27.925,33.924 v1(27.94,33.909)
MISO: J29.3 TP8.1 U2.13 U3.13 U4.12 U6.26 U7.1 | length 121.9
  Top Layer w0.254: TP8.1 3.556,69.977 3.81,69.723 3.81,65.518 3.418,65.126 3.404,65.126 2.54,64.262 2.54,51.689 2.945,51.284 J29.3 6.12,51.284 7.366,50.038 7.366,48.133 7.874,47.625 24.638,47.625 25.4,48.387 v1(25.4,49.276) ; v1(5.334,14.478) 5.334,16.891 7.493,19.05 7.493,24.892 11.049,28.448 v1(11.049,29.21) 11.049,29.591 11.684,30.226 21.082,30.226 23.876,27.432 31.369,27.432 v1(31.877,26.924)
  Signal Layer 1 w0.254: v1(25.4,49.276) 26.416,49.276 29.21,46.482 v1(29.21,42.545) 31.242,42.545 31.877,41.91 v1(31.877,26.924)
  Bottom Layer w0.254: U7.1 v1@5.346,14.466 ; v1(11.049,29.21) 11.049,31.611 U6.26 ; v1(25.4,49.276) 25.674,49.55 U3.13 ; v1(29.21,42.545) 29.225,42.53 U4.12 ; U2.13 31.603,26.65 v1(31.877,26.924)
MOSI: J29.2 TP7.1 U2.14 U3.14 U4.13 U6.25 U7.14 | length 134.8
  Top Layer w0.254: v1(3.81,12.954) 5.461,12.954 6.096,13.589 6.096,16.383 8.001,18.288 8.001,23.114 12.319,27.432 ; J29.2 7.366,51.784 ; TP7.1 7.366,69.977 7.366,51.816 7.874,51.308 7.874,48.641 8.382,48.133 23.749,48.133 v1(24.511,48.895) ; v1(12.319,29.21) 12.319,27.432 ; v1(33.401,27.432) 33.401,24.765 32.385,23.749 16.002,23.749 12.319,27.432
  Signal Layer 1 w0.254: v1(29.845,43.942) 30.607,43.942 32.385,42.164 32.385,36.703 33.401,35.687 v1(33.401,27.432)
  Bottom Layer w0.254: v1(3.81,12.954) 4.072,12.692 U7.14 ; v1(12.319,29.21) 12.319,31.631 U6.25 ; 23.876,48.895 23.622,48.895 ; v1(24.511,48.895) 23.622,48.895 ; U3.14 24.396,50.05 23.622,49.276 23.622,48.895 ; U4.13 29.845,41.13 v1(29.845,43.942) 29.845,43.785 29.621,43.561 27.836,43.561 27.684,43.409 25.171,43.409 23.622,44.958 23.622,48.895 ; U2.14 32.119,26.15 v1(33.401,27.432)
NetC3_1: C3.1 U2.9 | length 2.7
  Bottom Layer w0.254: C3.1 28.321,29.323 28.321,27.354 U2.9
NetC5_1: C5.1 U3.9 | length 2.7
  Bottom Layer w0.254: U3.9 28.825,47.121 29.337,46.609 C5.1@29.337,46.341
NetD1_K: D1.K R3.2 | length 15.1
  Top Layer w0.254: D1.K v3(53.213,17.145)
  Bottom Layer w0.254: R3.2 51.816,21.717 53.213,20.32 v3(53.213,17.145)
NetD2_K: D2.K R4.2 | length 16.9
  Top Layer w0.254: v1(3.81,59.69) D2.K
  Bottom Layer w0.254: v1(3.81,59.69) 3.81,56.007 6.477,53.34 R4.2
NetJ1_2: J1.2 R2.1 | length 4.6
  Top Layer w0.254: v1(49.784,45.72) 49.784,45.085 49.997,44.872 J1.2
  Bottom Layer w0.254: R2.1 v1(49.784,45.72)
NetJ1_3: J1.3 R1.1 | length 6.1
  Top Layer w0.254: v1(49.911,48.387) 49.911,46.736 51.125,45.522 J1.3
  Bottom Layer w0.254: R1.1 v1(49.911,48.387)
NetQ1_1: Q1.1 R5.1 | length 2.9
  Bottom Layer w0.254: R5.1 Q1.1
NetQ1_3: Q1.3 R3.1 | length 3.3
  Bottom Layer w0.254: Q1.3 R3.1
NetQ2_1: Q2.1 R6.2 | length 2.4
  Bottom Layer w0.254: Q2.1 20.261,53.34 R6.2
NetQ2_3: Q2.3 R4.1 | length 2.6
  Bottom Layer w0.254: R4.1 15.741,53.333 Q2.3
NetR5_2: R5.2 U2.18 | length 4
  Bottom Layer w0.254: U2.18 30.525,22.434 31.242,21.717 R5.2
NetR6_1: R6.1 U3.18 | length 3.2
  Bottom Layer w0.254: R6.1 26.035,53.34 26.625,52.75 U3.18
P2_1: J30.4 U6.5 | length 53.2
  Top Layer w0.254: v1(5.08,19.685) J30.4
  Signal Layer 1 w0.254: v1(5.08,19.685) 4.572,20.193 4.572,25.654 5.715,26.797 5.715,32.004 6.223,32.512 16.764,32.512 17.526,33.274 17.526,42.164 16.764,42.926 6.985,42.926 6.096,43.815 v1(6.096,46.355)
  Bottom Layer w0.254: U6.5 6.088,46.347 v1(6.096,46.355)
P2_2: J30.3 U6.4 | length 45.5
  Top Layer w0.254: J30.3 v1(5.08,27.305)
  Signal Layer 1 w0.254: v1(4.826,46.355) 4.826,44.069 6.375,42.52 16.535,42.52 17.018,42.037 17.018,33.401 16.535,32.918 5.994,32.918 5.08,32.004 v1(5.08,27.305)
  Bottom Layer w0.254: v1(4.826,46.355) 4.838,46.343 U6.4
RESET: J30.7 U6.29 | length 10.4
  Top Layer w0.254: J30.7 v1(2.54,27.305)
  Bottom Layer w0.254: v1(2.54,27.305) 2.54,28.448 3.33,29.238 v1(7.338,29.238) U6.29
RX: TP9.1 U1.15 U4.15 U6.8 | length 74.4
  Top Layer w0.254: v1(9.838,46.287) 9.838,46.668 10.287,47.117 35.941,47.117 37.338,45.72 v1(37.338,42.164)
  Bottom Layer w0.254: TP9.1 5.588,62.484 2.921,59.817 2.921,56.321 6.309,52.934 8.534,52.934 9.838,51.63 v1(9.838,46.287) U6.8 ; U4.15 35.224,40.05 v1(37.338,42.164) 37.338,45.593 39.06,47.315 U1.15
S1: J2.1 U2.19 | length 37.6
  Top Layer w0.254: J2.1 v1(13.335,4.445)
  Bottom Layer w0.254: v1(13.335,4.445) 20.066,4.445 20.599,3.912 27.788,3.912 29.825,5.949 U2.19
S2: J3.1 U2.20 | length 26.4
  Top Layer w0.254: J3.1 v1(23.495,4.445)
  Bottom Layer w0.254: v1(23.495,4.445) 27.686,4.445 29.325,6.084 U2.20
S3: J4.1 U2.21 | length 58.8
  Top Layer w0.254: J4.1 v1(33.655,4.445)
  Bottom Layer w0.254: U2.21 28.825,6.346 27.559,5.08 12.954,5.08 12.7,4.826 12.7,3.937 13.132,3.505 28.016,3.505 28.956,4.445 v1(33.655,4.445)
S4: J5.1 U2.22 | length 70.1
  Top Layer w0.254: J5.1 v1(43.815,4.445)
  Bottom Layer w0.254: U2.22 28.325,6.481 27.432,5.588 12.7,5.588 12.217,5.105 12.217,3.658 12.827,3.048 33.782,3.048 35.179,4.445 v1(43.815,4.445)
S5: J6.1 U2.23 | length 80.1
  Top Layer w0.254: J6.1 v1(43.815,11.43)
  Bottom Layer w0.254: U2.23 27.825,6.87 27.051,6.096 12.446,6.096 11.811,5.461 11.811,3.175 12.421,2.565 34.061,2.565 35.052,3.556 44.323,3.556 45.339,4.572 45.339,6.35 43.815,7.874 v1(43.815,11.43)
S6: J7.1 U2.24 | length 94.4
  Top Layer w0.254: J7.1 v1(33.655,11.43)
  Bottom Layer w0.254: U2.24 27.325,7.132 26.797,6.604 12.192,6.604 11.176,5.588 11.176,3.175 12.192,2.159 34.544,2.159 35.433,3.048 45.466,3.048 46.101,3.683 46.101,7.239 44.704,8.636 44.704,11.684 43.942,12.446 41.783,12.446 40.767,11.43 v1(33.655,11.43)
S7: J8.1 U2.1 | length 17.7
  Top Layer w0.254: J8.1 v1(23.495,11.43)
  Bottom Layer w0.254: v1(23.495,11.43) 25.4,11.43 26.625,12.655 U2.1
S8: J9.1 U2.2 | length 27
  Top Layer w0.254: J9.1 v1(13.335,11.43)
  Bottom Layer w0.254: v1(13.335,11.43) 22.225,11.43 25.146,14.351 25.146,24.003 25.793,24.65 U2.2
S9: J10.1 U2.3 | length 25.9
  Top Layer w0.254: J10.1 v1(13.335,18.415)
  Bottom Layer w0.254: v1(13.335,18.415) 13.335,17.272 14.605,16.002 23.368,16.002 24.257,16.891 24.257,24.765 24.642,25.15 U2.3
S10: J11.1 U2.4 | length 12.5
  Top Layer w0.254: J11.1 v1(23.495,18.415)
  Bottom Layer w0.254: v1(23.495,18.415) 23.495,25.019 24.126,25.65 U2.4
S11: J12.1 U2.5 | length 24
  Top Layer w0.254: J12.1 v1(33.655,18.415)
  Signal Layer 1 w0.254: v1(22.86,19.05) 26.035,19.05 26.67,18.415 v1(33.655,18.415)
  Bottom Layer w0.254: v1(22.86,19.05) 22.885,19.075 22.885,25.425 23.61,26.15 U2.5
S12: J13.1 U2.6 | length 35.3
  Top Layer w0.254: J13.1 v1(43.815,18.415)
  Signal Layer 1 w0.254: v1(22.352,19.685) 33.909,19.685 35.179,18.415 v1(43.815,18.415)
  Bottom Layer w0.254: v1(22.352,19.685) 22.352,25.781 23.221,26.65 U2.6
S13: J14.1 U3.19 | length 32.6
  Top Layer w0.254: v1(12.065,71.755) 12.085,71.775 J14.1
  Bottom Layer w0.254: v1(12.065,71.755) 20.193,71.755 27.325,64.623 U3.19
S14: J15.1 U3.20 | length 25.4
  Top Layer w0.254: v1(22.225,71.755) 22.245,71.775 J15.1
  Bottom Layer w0.254: v1(22.225,71.755) 24.765,71.755 27.825,68.695 U3.20
S15: J16.1 U3.21 | length 24.2
  Top Layer w0.254: v1(32.385,71.755) 32.405,71.775 J16.1
  Bottom Layer w0.254: U3.21 28.325,69.346 30.734,71.755 v1(32.385,71.755)
S16: J17.1 U3.22 | length 31.9
  Top Layer w0.254: v1(42.545,71.755) 42.565,71.775 J17.1
  Bottom Layer w0.254: U3.22 28.825,66.05 ; 28.839,66.05 34.544,71.755 v1(42.545,71.755)
S17: J18.1 U3.23 | length 29.8
  Top Layer w0.254: v1(42.545,64.77) 42.565,64.79 J18.1
  Bottom Layer w0.254: U3.23 29.325,64.631 32.004,67.31 37.338,67.31 39.878,64.77 v1(42.545,64.77)
S18: J19.1 U3.24 | length 16.6
  Top Layer w0.254: v1(32.385,64.77) 32.385,67.29 J19.1
  Bottom Layer w0.254: U3.24 29.825,63.861 30.734,64.77 v1(32.385,64.77)
S19: J20.1 U3.1 | length 21.8
  Top Layer w0.254: v1(22.225,64.77) 22.245,64.79 J20.1
  Signal Layer 1 w0.254: v1(22.225,64.77) 26.67,64.77 31.115,60.325 v1(31.115,53.975)
  Bottom Layer w0.254: U3.1 30.525,53.385 v1(31.115,53.975)
S20: J21.1 U3.2 | length 32.1
  Top Layer w0.254: v1(12.065,64.77) 12.085,64.79 J21.1
  Signal Layer 1 w0.254: v1(12.065,64.77) 19.431,64.77 23.495,60.706 27.051,60.706 29.718,58.039 29.718,53.975 30.353,53.34 v1(31.75,53.34)
  Bottom Layer w0.254: U3.2 31.357,51.55 31.75,51.943 v1(31.75,53.34)
S21: J22.1 U3.3 | length 30.7
  Top Layer w0.254: v1(12.065,57.785) 12.065,60.305 J22.1
  Signal Layer 1 w0.254: v1(12.065,57.785) 20.447,57.785 21.717,59.055 26.162,59.055 29.083,56.134 29.083,53.848 30.226,52.705 v1(32.385,52.705)
  Bottom Layer w0.254: U3.3 32,51.05 32.385,51.435 v1(32.385,52.705)
S22: J23.1 U3.4 | length 20.5
  Top Layer w0.254: v1(22.225,57.785) 22.225,60.305 J23.1
  Signal Layer 1 w0.254: v1(22.225,57.785) 26.416,57.785 28.067,56.134 28.067,54.229 30.226,52.07 v1(33.02,52.07)
  Bottom Layer w0.254: U3.4 32.516,50.55 33.02,51.054 v1(33.02,52.07)
S23: J24.1 U3.5 | length 14
  Top Layer w0.254: v1(32.385,57.785) 32.385,60.305 J24.1
  Bottom Layer w0.254: U3.5 33.159,50.05 34.036,50.927 34.036,56.134 v1(32.385,57.785)
S24: J25.1 U3.6 | length 20.3
  Top Layer w0.254: v1(42.545,57.785) 42.545,60.305 J25.1
  Bottom Layer w0.254: U3.6 34.183,49.55 36.703,52.07 36.703,56.007 38.481,57.785 v1(42.545,57.785)
S25: J26.1 U2.7 | length 32.4
  Top Layer w0.254: J26.1 v1(43.815,25.4)
  Bottom Layer w0.254: U2.7 25.609,27.35 24.892,28.067 24.892,31.115 26.416,32.639 39.243,32.639 43.815,28.067 v1(43.815,25.4)
S26: J27.1 U3.7 | length 27.1
  Top Layer w0.254: v1(12.065,50.8) 12.065,53.32 J27.1
  Signal Layer 1 w0.254: v1(12.065,50.8) 12.065,51.689 12.827,52.451 29.21,52.451 30.734,50.927 v1(30.734,48.26)
  Bottom Layer w0.254: U3.7 30.525,48.85 30.734,48.641 v1(30.734,48.26)
SCLK: J29.4 TP6.1 U2.15 U3.15 U4.11 U6.23 U7.13 | length 181.4
  Top Layer w0.254: v1(3.429,12.192) 2.159,12.192 1.905,11.938 1.905,10.922 2.159,10.668 6.731,10.668 7.366,11.303 7.366,12.827 11.176,16.637 11.176,21.463 12.7,22.987 32.893,22.987 34.544,24.638 34.544,28.321 ; J29.4 5.731,50.784 6.731,49.784 6.731,44.958 8.28,43.409 28.092,43.409 v1(28.575,42.926) ; v1(14.859,29.21) 20.32,29.21 22.86,26.67 30.099,26.67 31.115,25.654 v1(32.639,25.654) 32.639,27.94 33.02,28.321 34.544,28.321 ; TP6.1 52.705,10.16 52.324,10.541 52.324,11.43 49.53,14.224 49.53,26.289 47.498,28.321 34.544,28.321
  Signal Layer 1 w0.254: v1(28.575,42.926) 28.575,42.291 28.956,41.91 30.861,41.91 31.344,41.427 31.344,26.187 31.877,25.654 v1(32.639,25.654)
  Bottom Layer w0.254: v1(3.429,12.192) U7.13 ; U6.23 14.859,31.629 v1(14.859,29.21) ; 24.638,50.546 23.749,50.546 23.216,50.013 23.216,44.729 25.019,42.926 v1(28.575,42.926) U4.11 ; 24.638,50.55 U3.15 ; U2.15 32.635,25.65 v1(32.639,25.654)
TX: TP10.1 U1.2 U4.14 U6.7 | length 77.8
  Top Layer w0.254: v1(8.588,46.307) 8.588,45.641 9.271,44.958 21.971,44.958 23.114,46.101 34.29,46.101 35.814,44.577 v1(35.814,42.672)
  Bottom Layer w0.254: TP10.1 2.032,56.636 6.14,52.527 7.798,52.527 8.588,51.737 v1(8.588,46.307) U6.7 ; U4.14 34.242,41.1 v1(35.814,42.672) 35.814,48.514 37.719,50.419 41.402,50.419 41.966,49.855 U1.2
USB_D+: C10.2 R1.2 U1.6 U6.11 | length 79
  Signal Layer 1 w0.254: v1(13.589,46.355) 13.589,49.149 12.954,49.784 11.43,49.784 10.287,50.927 10.287,64.77 11.43,65.913 36.57,65.913 48.006,54.477 48.006,51.181 47.752,50.927 46.863,50.927 46.496,51.294 v1(46.496,51.802)
  Bottom Layer w0.254: U6.11 v1(13.589,46.355) ; v1(13.589,46.355) v1(13.589,46.355) ; U1.6 44.775,47.315 45.847,48.387 R1.2 v1(46.496,51.802) 46.482,51.816 C10.2
USB_D-: C9.2 R2.2 U1.7 U6.12 | length 99.3
  Signal Layer 1 w0.254: v1(14.838,46.355) 14.838,49.128 14.859,49.149 13.818,50.19 11.786,50.19 10.922,51.054 10.922,64.643 11.684,65.405 36.449,65.405 47.371,54.483 v1(47.371,51.816)
  Bottom Layer w0.254: U6.12 v1(14.838,46.355) ; U1.7 44.902,46.665 45.847,45.72 R2.2 46.496,44.464 ; C9.2 45.198,43.166 46.496,44.464 ; v1(47.371,51.816) 50.8,51.816 53.467,49.149 53.467,41.783 52.959,41.275 51.435,41.275 50.8,41.91 50.8,43.942 50.14,44.602 46.634,44.602 46.496,44.464
V_USB: C2.1 J1.1 TP2.1 U5.1 | length 32.1
  Top Layer w0.254: v4(48.895,43.688) 50.165,43.688 50.699,44.222 J1.1 54.763,44.222 56.388,45.847 56.388,62.484 55.626,63.246 TP2.1
  Bottom Layer w0.508: U5.1@48.895,39.6 v4(48.895,43.688)
pads on no net: D1.0 D2.0 J1.4 J1.15 J1.16 J1.18 J2.0 J3.0 J4.0 J5.0 J6.0 J7.0 J8.0 J9.0 J10.0 J11.0 J12.0 J13.0 J14.0 J15.0 J16.0 J17.0 J18.0 J19.0 J20.0 J21.0 J22.0 J23.0 J24.0 J25.0 J26.0 J27.0 J28.6 J29.7 J29.8 J29.9 J29.MP1 J29.MP2 J30.5 J30.6 J30.8 J30.9 J30.10 J30.21 J30.22 Q1.0 Q2.0 U1.4 U1.5 U1.9 U1.11 U1.12 U1.14 U1.16 U2.8 U3.8 U4.1 U4.2 U4.4 U4.22 U4.23 U4.27 U4.28 U5.0 U6.6 U6.9 U6.13 U6.14 U6.15 U6.16 U6.19 U6.24 U7.10 U7.11

## Polygon pours and split planes (outlines as drawn)
GND on Ground "Top_Layer-GND" (solid, remove dead copper, pour order 0): 0.254,0.254 56.896,0.254 56.896,75.946 0.254,75.946 0.254,0.254
GND on Bottom Layer "Top_Layer-GND" (solid, remove dead copper, pour order 2): 0.254,0.254 56.896,0.254 56.896,75.946 0.254,75.946 0.254,0.254
GND on Top Layer "Top_Layer-GND" (solid, remove dead copper, pour order 4): 0.254,0.254 56.896,0.254 56.896,75.946 0.254,75.946 0.254,0.254
GND on Signal Layer 1 "Signal_Layer-GND" (solid, remove dead copper, pour order 6): 0.254,0.254 56.896,0.254 56.896,75.946 0.254,75.946 0.254,0.254

## Keep-outs
Keep-Out Layer:
  the board outline again, w0.254

## Other copper
Top Layer:
  pour cut-out: 0,41.91 16.51,41.91 16.51,33.401 0,33.401
Signal Layer 1:
  pour cut-out: 0,41.91 16.51,41.91 16.51,33.401 0,33.401
Ground:
  pour cut-out: 0,41.91 16.51,41.91 16.51,33.401 0,33.401
Bottom Layer:
  pour cut-out: 0,41.91 16.51,41.91 16.51,33.401 0,33.401

## Silkscreen, mask and mechanical layers (free items; w line width, h text height)
Top Overlay:
  lines w0.254: 0.127,0.127 57.023,0.127 57.023,76.073 0.127,76.073 0.127,0.127
Bottom Overlay:
  lines w0.254: 0.127,0.127 0.127,76.073 57.023,76.073 57.023,0.127 0.127,0.127
Mechanical 3:
  the board outline again, w0.254

## Text inside footprints (layer, text, board x,y; h text height)
J30: Top Overlay "2" at 7.493,21.933 h1 r270; Top Overlay "1" at 7.493,25.108 h1 r270